# EAGLE board charlieland4 (EAGLE 6.2)

Size 115.24 x 59.68 mm. Coordinates in mm from the lower left corner, seen from the top.
Outline: 0,0 115.24,0 115.24,59.68 0,59.68 0,0
Copper layers (1*16): Top 0.035mm / dielectric 1.5mm / Bottom 0.035mm
Design rules: minimum track width 30mil, minimum drill 24mil, track to track 8mil, track to pad 8mil, pad to pad 8mil, via to via 8mil, smd to smd 8mil, copper to edge 40mil, drill to drill 8mil, minimum pad ring 10mil, minimum via ring 8mil, stop-mask expansion 4mil, vias tented up to drill 0mil, thermal gap 10mil

## Footprints (pad centres in the part's own frame; a part is rotated, then mirrored left to right if it is on the bottom)
1X04 = drill 1.016 pad 1.88 square: 1 0,0 | drill 1.016 pad 1.88: 2 2.54,0; 3 5.08,0; 4 7.62,0
DO-1N4148 = drill 0.9: A -3.81,0; C 3.81,0
1X02 = drill 1.016 pad 1.88: 1 0,0; 2 2.54,0
LED5MM = drill 0.813 pad 1.676 octagon: A -1.27,0; K 1.27,0
LED3MM = drill 0.813 pad 1.676 octagon: A -1.27,0; K 1.27,0
AXIAL-0.3 = drill 0.9 pad 1.88: P$1 -3.81,0; P$2 3.81,0
TACTILE-PTH = drill 1.016 pad 1.88: 1 -3.251,2.261; 2 3.251,2.261; 3 -3.251,-2.261; 4 3.251,-2.261

## Placement (x,y rotation side)
3  [1X04]  36.83,19.05 90 top
D1  [DO-1N4148]  3.81,16.51 270 top
D2  [DO-1N4148]  3.81,5.08 90 top
D3  [DO-1N4148]  15.24,16.51 90 top
D4  [DO-1N4148]  15.24,5.08 90 top
D5  [DO-1N4148]  26.67,16.51 90 top
D6  [DO-1N4148]  26.67,5.08 90 top
D7  [DO-1N4148]  3.81,39.37 90 top
D8  [DO-1N4148]  3.81,27.94 90 top
D9  [DO-1N4148]  15.24,39.37 90 top
D10  [DO-1N4148]  15.24,27.94 90 top
D11  [DO-1N4148]  26.67,39.37 90 top
D12  [DO-1N4148]  26.67,27.94 90 top
JP1  [1X02]  8.89,15.24 90 top
JP2  [1X02]  8.89,3.81 90 top
JP3  [1X02]  20.32,15.24 90 top
JP4  [1X02]  20.32,3.81 90 top
JP5  [1X02]  31.75,15.24 90 top
JP6  [1X02]  31.75,3.81 90 top
JP7  [1X02]  8.89,38.1 90 top
JP8  [1X02]  8.89,26.67 90 top
JP9  [1X02]  20.32,38.1 90 top
JP10  [1X02]  20.32,26.67 90 top
JP11  [1X02]  31.75,38.1 90 top
JP12  [1X02]  31.75,26.67 90 top
LED1  [LED5MM]  3.81,16.51 0 top
LED2  [LED3MM]  3.81,16.51 0 top
LED3  [LED5MM]  3.81,5.08 0 top
LED4  [LED3MM]  3.81,5.08 0 top
LED5  [LED5MM]  15.24,16.51 0 top
LED6  [LED3MM]  15.24,16.51 0 top
LED7  [LED5MM]  15.24,5.08 0 top
LED8  [LED3MM]  15.24,5.08 0 top
LED9  [LED5MM]  26.67,16.51 0 top
LED10  [LED3MM]  26.67,16.51 0 top
LED11  [LED5MM]  26.67,5.08 0 top
LED12  [LED3MM]  26.67,5.08 0 top
LED13  [LED5MM]  3.81,39.37 0 top
LED14  [LED3MM]  3.81,39.37 0 top
LED15  [LED5MM]  3.81,27.94 0 top
LED16  [LED3MM]  3.81,27.94 0 top
LED17  [LED5MM]  15.24,39.37 0 top
LED18  [LED3MM]  15.24,39.37 0 top
LED19  [LED5MM]  15.24,27.94 0 top
LED20  [LED3MM]  15.24,27.94 0 top
LED21  [LED5MM]  26.67,39.37 0 top
LED22  [LED3MM]  26.67,39.37 0 top
LED23  [LED5MM]  26.67,27.94 0 top
LED24  [LED3MM]  26.67,27.94 0 top
R1  [AXIAL-0.3]  8.89,16.51 90 top
R2  [AXIAL-0.3]  8.89,5.08 90 top
R3  [AXIAL-0.3]  20.32,16.51 90 top
R4  [AXIAL-0.3]  20.32,5.08 90 top
R5  [AXIAL-0.3]  31.75,16.51 90 top
R6  [AXIAL-0.3]  31.75,5.08 90 top
R7  [AXIAL-0.3]  8.89,39.37 90 top
R8  [AXIAL-0.3]  8.89,27.94 90 top
R9  [AXIAL-0.3]  20.32,39.37 90 top
R10  [AXIAL-0.3]  20.32,27.94 90 top
R11  [AXIAL-0.3]  31.75,39.37 90 top
R12  [AXIAL-0.3]  31.75,27.94 90 top
S1  [TACTILE-PTH]  8.89,16.51 90 top
S2  [TACTILE-PTH]  8.89,5.08 90 top
S3  [TACTILE-PTH]  20.32,16.51 90 top
S4  [TACTILE-PTH]  20.32,5.08 90 top
S5  [TACTILE-PTH]  31.75,16.51 90 top
S6  [TACTILE-PTH]  31.75,5.08 90 top
S7  [TACTILE-PTH]  8.89,39.37 90 top
S8  [TACTILE-PTH]  8.89,27.94 90 top
S9  [TACTILE-PTH]  20.32,39.37 90 top
S10  [TACTILE-PTH]  20.32,27.94 90 top
S11  [TACTILE-PTH]  31.75,39.37 90 top
S12  [TACTILE-PTH]  31.75,27.94 90 top

## Library data of the parts
3 JP1-JP12 R1-R12 S1-S12 = SparkFun
D1-D12 LED1-LED24 = adafruit

## Nets
1: 3.1 D2.C D4.C D7.C JP1.2 JP3.2 JP8.2 LED3.K LED4.K LED7.K LED8.K LED13.K LED14.K R1.P$1 R3.P$1 R8.P$1 S1.3 S1.4 S3.3 S3.4 S8.3 S8.4
2: 3.2 D1.C D3.C D6.C D9.C JP2.2 JP4.2 JP5.2 JP10.2 LED1.K LED2.K LED5.K LED6.K LED11.K LED12.K LED17.K LED18.K R2.P$1 R4.P$1 R5.P$1 R10.P$1 S2.3 S2.4 S4.3 S4.4 S5.3 S5.4 S10.3 S10.4
3: 3.3 D5.C D11.C JP6.2 JP12.2 LED9.K LED10.K LED21.K LED22.K R6.P$1 R12.P$1 S6.3 S6.4 S12.3 S12.4
4: 3.4 D8.C D10.C D12.C JP7.2 JP9.2 JP11.2 LED15.K LED16.K LED19.K LED20.K LED23.K LED24.K R7.P$1 R9.P$1 R11.P$1 S7.3 S7.4 S9.3 S9.4 S11.3 S11.4
N$1: D3.A JP3.1 LED5.A LED6.A R3.P$2 S3.1 S3.2
N$2: D4.A JP4.1 LED7.A LED8.A R4.P$2 S4.1 S4.2
N$3: D1.A JP1.1 LED1.A LED2.A R1.P$2 S1.1 S1.2
N$4: D2.A JP2.1 LED3.A LED4.A R2.P$2 S2.1 S2.2
N$5: D5.A JP5.1 LED9.A LED10.A R5.P$2 S5.1 S5.2
N$6: D6.A JP6.1 LED11.A LED12.A R6.P$2 S6.1 S6.2
N$7: D7.A JP7.1 LED13.A LED14.A R7.P$2 S7.1 S7.2
N$8: D8.A JP8.1 LED15.A LED16.A R8.P$2 S8.1 S8.2
N$9: D9.A JP9.1 LED17.A LED18.A R9.P$2 S9.1 S9.2
N$10: D10.A JP10.1 LED19.A LED20.A R10.P$2 S10.1 S10.2
N$11: D11.A JP11.1 LED21.A LED22.A R11.P$2 S11.1 S11.2
N$12: D12.A JP12.1 LED23.A LED24.A R12.P$2 S12.1 S12.2

## Tracks (layer width: path | path; a pad name or v marks a point on that pad's centre or on a via)
1  (18 unrouted)
2  (24 unrouted)
3  (12 unrouted)
4  (18 unrouted)
N$1  (5 unrouted)
N$2  (5 unrouted)
N$3  (5 unrouted)
N$4  (5 unrouted)
N$5  (5 unrouted)
N$6  (5 unrouted)
N$7  (5 unrouted)
N$8  (5 unrouted)
N$9  (5 unrouted)
N$10  (5 unrouted)
N$11  (5 unrouted)
N$12  (5 unrouted)